# Altium PCB SlowDown!V1.0.PcbDoc
Units mm, origin at the board's own origin, x right, y up, seen from the top; angles counter-clockwise.
Board outline 24.13 x 19.05 mm, 2 copper layers (Top Layer, Bottom Layer); 21 components, 27 nets, 108 pads, 19 vias.
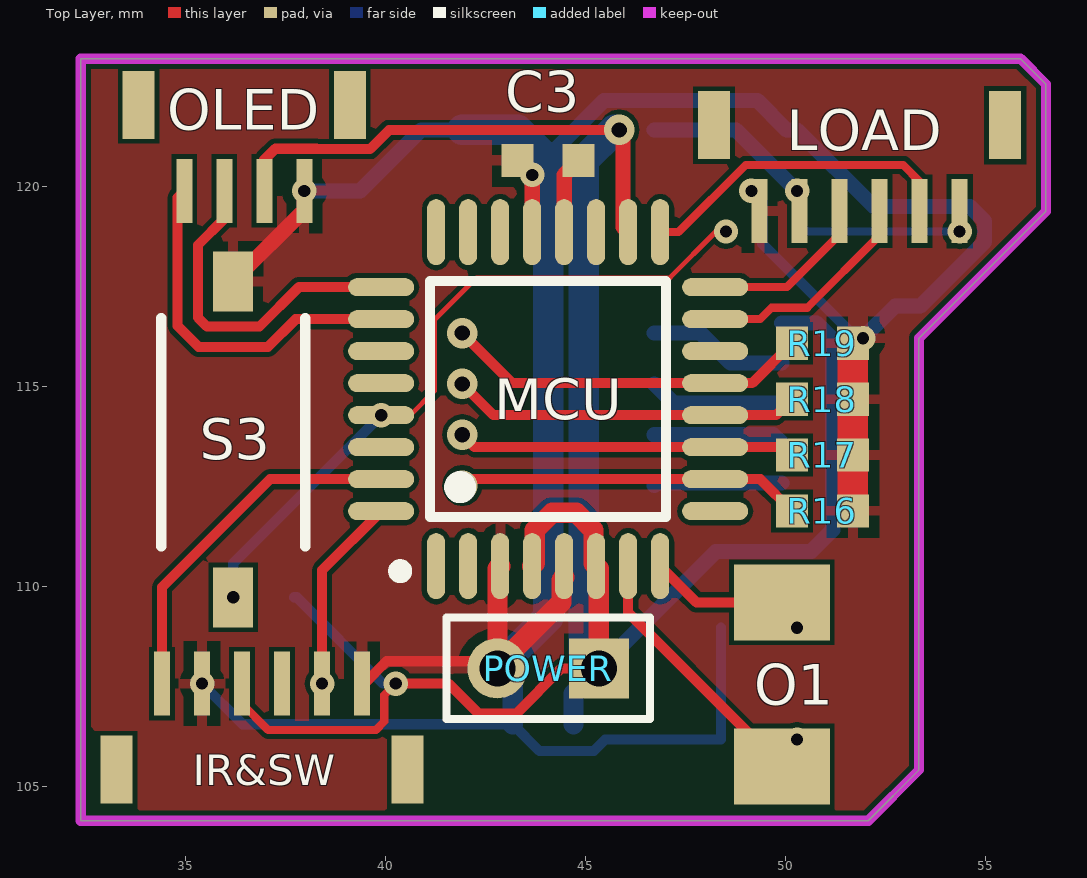
[diagram p0: Top Layer view]
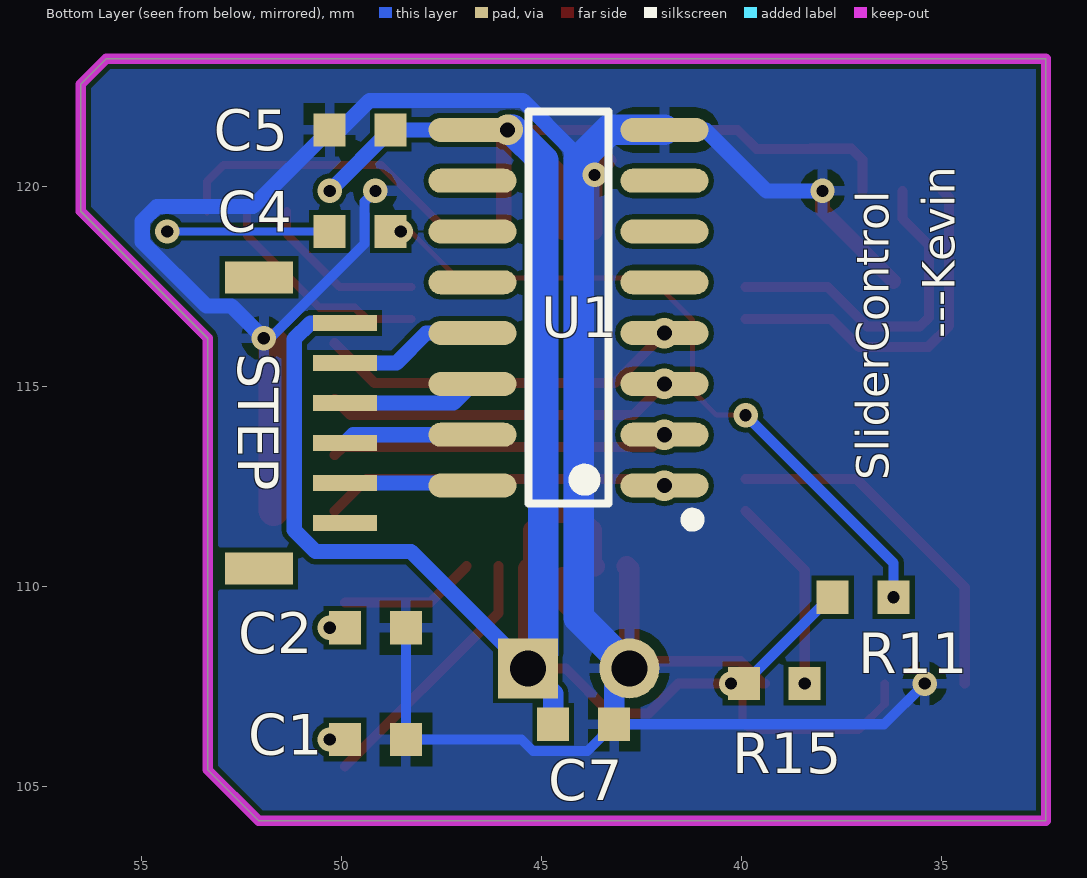
[diagram p1: Bottom Layer view, seen from below]

## Layer stack, top to bottom
Top Solder: solder mask 0.0102, Solder Resist, Dk 3.5
Top Layer: signal copper 0.0356
Dielectric 1: dielectric 0.32, FR-4, Dk 4.8
Bottom Layer: signal copper 0.0356
Bottom Solder: solder mask 0.0102, Solder Resist, Dk 3.5

## Board outline
32.385,104.14 32.385,123.19 55.88,123.19 56.515,122.555 56.515,119.38 53.34,116.205 53.34,105.41 52.07,104.14

## Design rules (kind name [scope] priority, off if disabled: settings)
Clearance [All] p1: gap=0.127
PolygonConnect [All] p1: connectstyle=Relief reliefconductorwidth=0.254 reliefentries=4 polygonreliefangle="90 Angle" airgapwidth=0.254
RoutingVias [All] p1: holewidth=0.711 width=1.27 viastyle="Through Hole" minholewidth=0.711 minwidth=1.27 maxholewidth=0.711 maxwidth=1.27
SolderMaskExpansion [All] p1: expansion=0.102
Width [All] p1: maxlimit=2.54 minlimit=0.127 preferedwidth=0.254
29 further rules are at their usual default settings.

## Components (designator, comment, footprint, x,y, rotation, side; value= is the part's Value field where it differs from the comment)
C1 "22pf" 0603Standard 48.387,106.172 r0 bottom
C2 "22pf" 0603Standard 48.387,108.966 r0 bottom
C3 "0.1uF" 0603Standard 43.307,120.65 r0 top
C4 "0.1uF" 0603Standard 48.768,118.872 r0 bottom
C5 "0.1uf" 0603Standard 48.768,121.412 r0 bottom
C7 "0.1uf" 0603Standard 44.704,106.553 r180 bottom
IR&SW "Header 6" SH-6P 34.417,107.569 r0 top (schematic designator IR&SWITCH)
LOAD "Header 6" SH-6P 54.356,119.38 r180 top (schematic designator DOWNLOAD)
MCU "Atmega328P-AU" ATMega328P-AU 44.069,114.681 r0 top
O1 "16M" 16MHZ20PF 49.911,109.601 r270 top
OLED "Header 4" SH-4P 37.973,119.888 r180 top
POWER "Header 2" HDR1X2 45.339,107.95 r180 top
R11 "Res2" 0603Standard 37.719,109.728 r180 bottom
R15 "Res2" 0603Standard 38.417,107.569 r0 bottom
R16 "Res2" 0603Standard 51.689,111.887 r180 top
R17 "Res2" 0603Standard 51.689,113.284 r180 top
R18 "Res2" 0603Standard 51.689,114.681 r180 top
R19 "Res2" 0603Standard 51.689,116.078 r180 top
S3 "SW-SPST" BUTTOM 36.195,109.728 r90 top
STEP "Header 6" SH-6P 49.911,116.586 r270 bottom (schematic designator STEPPER)
U1 "ULN2003A" ULN2003A_SOP16 44.323,116.967 r90 bottom

## Footprints (in the part's own frame and the unit in brackets; to place one, negate y for a bottom-side part, rotate by r counter-clockwise, add the part's x,y. Pads: shape width x height; smd on the part's side, far side on the other; paste and mask are expansions set on the pad)
16MHZ20PF [mm]
  rect 1.9x2.4 smd: 1(0,0) 2(4.1,0)
0603Standard [mm]
  rect 0.8x0.83 smd: 1(0,0) 2(1.524,0)
ATMega328P-AU [mm]
  oval 0.45x1.65 smd: 1(-2.8,-4.175) 2(-2,-4.175) 3(-1.2,-4.175) 4(-0.4,-4.175) 5(0.4,-4.175) 6(1.2,-4.175) 7(2,-4.175) 8(2.8,-4.175) 17(2.8,4.175) 18(2,4.175) 19(1.2,4.175) 20(0.4,4.175) 21(-0.4,4.175) 22(-1.2,4.175) 23(-2,4.175) 24(-2.8,4.175)
  oval 1.65x0.45 smd: 9(4.175,-2.8) 10(4.175,-2) 11(4.175,-1.2) 12(4.175,-0.4) 13(4.175,0.4) 14(4.175,1.2) 15(4.175,2) 16(4.175,2.8) 25(-4.175,2.8) 26(-4.175,2) 27(-4.175,1.2) 28(-4.175,0.4) 29(-4.175,-0.4) 30(-4.175,-1.2) 31(-4.175,-2) 32(-4.175,-2.8)
  silkscreen extent -3.85,-4.45 2.95,2.95
BUTTOM [mm]
  rect 1.5x1 smd: 1(0,0) 2(7.9,0)
  silkscreen extent 1.27,-1.8 6.98,1.8
HDR1X2 [mm] "Connector; Header; 2 Position"
  rect 1.5x1.5 hole 0.9: 1(0,0)
  round 1.5 hole 0.9: 2(2.54,0)
  silkscreen extent -1.27,-1.27 3.81,1.27
SH-4P [mm]
  rect 0.8x1.7 smd: 0(-1.14,-2.15) 0(4.14,-2.15)
  rect 0.4x1.6 smd: 1(0,0) 2(1,0) 3(2,0) 4(3,0)
SH-6P [mm]
  rect 0.8x1.7 smd: 0(-1.14,-2.15) 0(6.14,-2.15)
  rect 0.4x1.6 smd: 1(0,0) 2(1,0) 3(2,0) 4(3,0) 5(4,0) 6(5,0)
ULN2003A_SOP16 [mm]
  oval 0.6x2.2 smd: 1(-4.445,-2.4) 2(-3.175,-2.4) 3(-1.905,-2.4) 4(-0.635,-2.4) 5(0.635,-2.4) 6(1.905,-2.4) 7(3.175,-2.4) 8(4.445,-2.4) 9(4.445,2.4) 10(3.175,2.4) 11(1.905,2.4) 12(0.635,2.4) 13(-0.635,2.4) 14(-1.905,2.4) 15(-3.175,2.4) 16(-4.445,2.4)
  silkscreen extent -5.45,-3.25 4.9,1

## Part data
C1 C2 C5 C7: library part Cap, "Capacitor"
C3 C4: library part cap, "Capacitor"
IR&SW LOAD STEP: "Header, 6-Pin"
O1: library part "Crystal Osc 16M"
OLED: "Header, 4-Pin"
POWER: "Header, 2-Pin"
R11 R15 R16 R17 R18 R19: "Resistor"
S3: "Single-Pole, Single-Throw Switch"

## Via types
v1: diameter 0.61, hole 0.305, Top Layer to Bottom Layer, tented both sides, 14 vias
v2: diameter 0.762, hole 0.381, Top Layer to Bottom Layer, tented both sides, 5 vias

## Nets (pads, with @x,y where several pads share a name; then routed paths per layer and width w, separated by ;. In a path a pad name is that pad's centre, name@x,y a point inside that pad or via, vN(x,y) a via of type N, cw(c..) or ccw(c..) an arc to the next point about the centre after c; other vN are vias at no path point)
5V: C5.1 C7.1 IR&SW.3 LOAD.5 MCU.4 MCU.6 MCU.18 OLED.2 POWER.1 R11.1 R15.2 STEP.1 U1.9 | length 66.6
  Top Layer w0.203: IR&SW.3 36.417,107.066 37.07,106.413 39.764,106.413 39.973,106.622 39.973,107.283 v1(40.259,107.569)
  Top Layer w0.254: OLED.2 36.973,120.666 37.249,120.942 38.278,120.942 38.286,120.934 39.618,120.934 40.096,121.412 v2(45.847,121.412) ; v1(40.259,107.569) 41.581,107.569 42.331,106.819 43.267,106.819 44.398,107.95 POWER.1
  Top Layer w0.381: v2(45.847,121.412) 45.938,121.321 45.938,118.987 MCU.18
  Top Layer w0.508: MCU.4 43.736,110.573 43.736,111.41 44.165,111.839 44.773,111.839 45.202,111.41 45.202,110.573 MCU.6 45.336,110.439 45.336,107.953 POWER.1
  Bottom Layer w0.254: R11.1 37.782,109.728 R15.2
  Bottom Layer w0.381: POWER.1 48.26,110.871 50.645,110.871 51.181,111.407 51.181,116.18 50.775,116.586 STEP.1 ; U1.9 C5.1 v1(50.292,119.888)
  Bottom Layer w0.508: C7.1 44.704,107.315 POWER.1
  Bottom Layer w0.762: POWER.1 44.958,108.331 44.958,120.65 U1.9@45.72,121.412
A0: MCU.23
A1: MCU.24
A4: MCU.27
A5: MCU.28
A+: STEP.5 U1.16 | length 3.2
  Bottom Layer w0.381: U1.16 46.787,112.586 STEP.5
A-: STEP.3 U1.14 | length 3.4
  Bottom Layer w0.381: U1.14 47.199,114.586 STEP.3
B+: STEP.4 U1.15 | length 3.3
  Bottom Layer w0.381: U1.15 49.705,113.792 STEP.4
B-: STEP.2 U1.13 | length 3.5
  Bottom Layer w0.381: U1.13 47.879,116.332 48.625,115.586 STEP.2
GND: C1.1 C2.1 C3.1 C5.2 C7.2 IR&SW.2 IR&SW.6 LOAD.6 MCU.3 MCU.5 MCU.21 OLED.1 POWER.2 R16.1 R17.1 R18.1 R19.1 S3.2 U1.8 | length 79.1
  Top Layer w0.254: IR&SW.6 39.469,107.569 40.028,108.128 42.621,108.128 POWER.2
  Top Layer w0.381: S3.2 37.973,119.406 v1(37.973,119.888) ; C3.1 v1(43.669,120.288) MCU.21
  Top Layer w0.508: MCU.3 42.802,110.439 POWER.2@42.802,108.002 ; MCU.5@44.469,110.228 44.402,110.161 44.402,109.602 POWER.2@42.802,108.002 ; POWER.2@42.802,108.002 42.799,107.999 POWER.2 42.802,107.953 POWER.2@42.802,108.002
  Top Layer w0.762: R16.1 R17.1 R18.1 R19.1
  Bottom Layer w0.254: v1(35.417,107.569) 36.433,106.553 C7.2 43.849,105.884 45.209,105.884 45.497,106.172 C1.1 C2.1 ; v1(49.149,119.888) 49.422,119.615 49.422,118.568 51.785,116.205 v1(51.943,116.205)
  Bottom Layer w0.381: v1(37.973,119.888) 39.37,119.888 40.894,121.412 U1.8 ; 44.069,120.65 44.259,120.84 44.259,120.939 45.465,122.145 49.3,122.145 50.032,121.412 C5.2 52.21,119.494 54.614,119.494 54.978,119.13 54.978,118.614 53.373,117.008 52.746,117.008 v1(51.943,116.205)
  Bottom Layer w0.508: POWER.2 43.18,107.569 C7.2
  Bottom Layer w0.762: U1.8 43.307,121.412 44.069,120.65 44.069,109.22 POWER.2
IROUT: IR&SW.1 MCU.31 | length 9
  Top Layer w0.254: IR&SW.1 34.417,109.982 37.116,112.681 MCU.31
MISO: LOAD.4 MCU.16 | length 4.2
  Top Layer w0.203: MCU.16 50.044,117.481 51.356,118.793 LOAD.4
MOSI: LOAD.3 MCU.15 | length 5.6
  Top Layer w0.203: MCU.15 49.371,116.681 49.657,116.967 50.546,116.967 52.356,118.777 LOAD.3
NetC1_2: C1.2 MCU.7 O1.2 | length 6.6
  Top Layer w0.254: MCU.7 46.069,109.343 O1.2
  other v1: 50.292,106.172
NetC2_2: C2.2 MCU.8 O1.1 | length 3.4
  Top Layer w0.254: MCU.8 47.774,109.601 O1.1
  other v1: 50.292,108.966
NetC3_2: C3.2 MCU.20 | length 1.9
  Top Layer w0.381: MCU.20 44.469,120.288 C3.2
NetC4_1: C4.1 MCU.29 R11.2 S3.1 | length 17.6
  Top Layer w0.127: v1(39.894,114.281) 40.621,114.281 41.225,114.885 41.225,116.663 42.276,117.714 47.109,117.714 48.268,118.872 v1(48.514,118.872)
  Bottom Layer w0.254: v1(36.195,109.728) 36.195,110.582 v1(39.894,114.281)
OLED_SCL: MCU.25 OLED.3 | length 8.5
  Top Layer w0.254: OLED.3 35.973,119.195 35.314,118.536 35.314,116.72 35.537,116.497 36.853,116.497 37.837,117.481 MCU.25
OLED_SDA: MCU.26 OLED.4 | length 9
  Top Layer w0.254: OLED.4 34.806,119.721 34.806,116.51 35.327,115.989 37.063,115.989 37.755,116.681 MCU.26
RST: C4.2 LOAD.1 | length 4.2
  Bottom Layer w0.203: C4.2@50.292,119.126 50.546,118.872 v1(54.356,118.872)
RX1: MCU.30
SCK: LOAD.2 MCU.17 | length 8.1
  Top Layer w0.203: MCU.17 47.329,118.856 49.009,120.536 52.946,120.536 53.356,120.126 LOAD.2
STEP1: MCU.10 R16.2 U1.1 | length 8.6
  Top Layer w0.254: v2(41.923,112.522) 42.082,112.681 MCU.10 49.371,112.681 R16.2
STEP2: MCU.11 R17.2 U1.2 | length 8.5
  Top Layer w0.254: v2(41.923,113.792) 42.234,113.481 MCU.11 49.968,113.481 R17.2
STEP3: MCU.12 R18.2 U1.3 | length 8.7
  Top Layer w0.254: v2(41.923,115.062) 42.704,114.281 MCU.12 49.765,114.281 R18.2
STEP4: MCU.13 R19.2 U1.4 | length 9.2
  Top Layer w0.254: v2(41.923,116.332) 43.174,115.081 MCU.13 49.168,115.081 R19.2
SWITCH: IR&SW.5 MCU.32 R15.1 | length 4.9
  Top Layer w0.254: v1(38.417,107.569) 38.417,110.404 MCU.32
pads on no net: IR&SW.0 IR&SW.4 LOAD.0 MCU.1 MCU.2 MCU.9 MCU.14 MCU.19 MCU.22 OLED.0 STEP.0 STEP.6 U1.5 U1.6 U1.7 U1.10 U1.11 U1.12

## Polygon pours and split planes (outlines as drawn)
GND on Bottom Layer "Top Layer-No Net" (solid, remove dead copper, pour order 4): 31.115,124.206 31.496,124.587 59.309,124.587 59.309,103.378 59.055,103.124 28.956,103.124
GND on Top Layer "Top Layer-No Net" (solid, remove dead copper, pour order 6): 30.861,125.095 58.293,125.095 59.563,123.825 58.166,122.428 58.166,102.87 30.48,102.87

## Keep-outs
Keep-Out Layer:
  the board outline again, w0.254

## Silkscreen, mask and mechanical layers (free items; w line width, h text height)
Bottom Overlay:
  text "---Kevin" at 34.671,116.205 h0.81 r270
  text "SliderControl" at 36.322,112.649 h0.81 r270